# EAGLE board amphenol_npa201_edgemount (EAGLE 8.2.2)
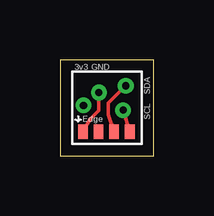
[diagram p0: board, top side]
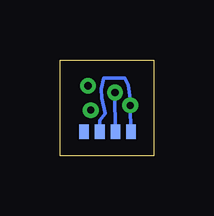
[diagram p1: board, bottom side, seen from below]

Size 3.91 x 4.02 mm. Coordinates in mm from the lower left corner, seen from the top.
Outline: 0,0 3.9,0 3.91,4.02 0.01,4.02 0,0
Copper layers (1*16): Top 0.0356mm / dielectric 1.5011mm / Bottom 0.0356mm
Design rules "oshpark-2layer *": minimum track width 6mil, minimum drill 12mil, track to track 6mil, track to pad 6mil, pad to pad 6mil, via to via 6mil, smd to smd 6mil, copper to edge 15mil, drill to drill 6mil, minimum pad ring 7mil, minimum via ring 7mil, stop-mask expansion 2.5mil, vias tented up to drill 0mil, thermal gap 10mil

## Footprints (pad centres in the part's own frame; a part is rotated, then mirrored left to right if it is on the bottom)
AMPHENOL_NPA201_EDGEMOUNT = smd 0.4 x 0.6: P$1 0.975,-0.725; P$2 0.325,-0.725; P$3 -0.325,-0.725; P$4 -0.975,-0.725 | smd 0.4 x 0.6 bottom: P$5 -0.975,-0.725; P$6 -0.325,-0.725; P$7 0.325,-0.725; P$8 0.975,-0.725
WIREPAD_0,5/0,3 = drill 0.3 pad 0.5: P$1 0,0

## Placement (x,y rotation side)
U$1  AMPHENOL_NPA201EDGEMOUNT  [AMPHENOL_NPA201_EDGEMOUNT]  1.93,0.29 180 top
U$2  WIREPADWIREPAD_0,5/0,3  [WIREPAD_0,5/0,3]  2.74,2.94 180 top
U$3  WIREPADWIREPAD_0,5/0,3  [WIREPAD_0,5/0,3]  2.63,1.92 0 top
U$4  WIREPADWIREPAD_0,5/0,3  [WIREPAD_0,5/0,3]  1.62,2.66 0 top
U$5  WIREPADWIREPAD_0,5/0,3  [WIREPAD_0,5/0,3]  0.98,2.12 0 top

## Library data of the parts
U$1-U$5 = Sombeck_lib

## Nets
+3V3: U$1.P$6 U$1.P$8 U$5.P$1
GND: U$1.P$1 U$1.P$7 U$4.P$1
N$1: U$1.P$3 U$2.P$1
N$2: U$1.P$4 U$3.P$1

## Tracks (layer width: path | path; a pad name or v marks a point on that pad's centre or on a via)
+3V3
  Bottom 0.152: U$1.P$8 U$5.P$1 0.97,2.24 1.07,2.96 1.21,3.26 2.08,3.25 2.19,2.8 2.18,2.43 2.02,1.79 2.25,1.5 U$1.P$6
GND
  Top 0.152: U$1.P$1 1.26,1.55 1.61,1.91 U$4.P$1
  Bottom 0.152: U$1.P$7 U$4.P$1
N$1
  Top 0.152: U$1.P$3 2,1.74 2.02,2.22 U$2.P$1
N$2
  Top 0.152: U$1.P$4 U$3.P$1

## Text on the board
tPlace: 3v3 | GND | SDA | SCL